# Altium PCB PCB1.PcbDoc (part 6 of 8)
Units mil, origin at the board's own origin, x right, y up, seen from the top; angles counter-clockwise.
Board outline 6000 x 4000 mil, 2 copper layers (Top Layer, Bottom Layer); 1253 components, 565 nets, 6549 pads, 0 vias.
Unrouted connection lines stored in the file: 1925.
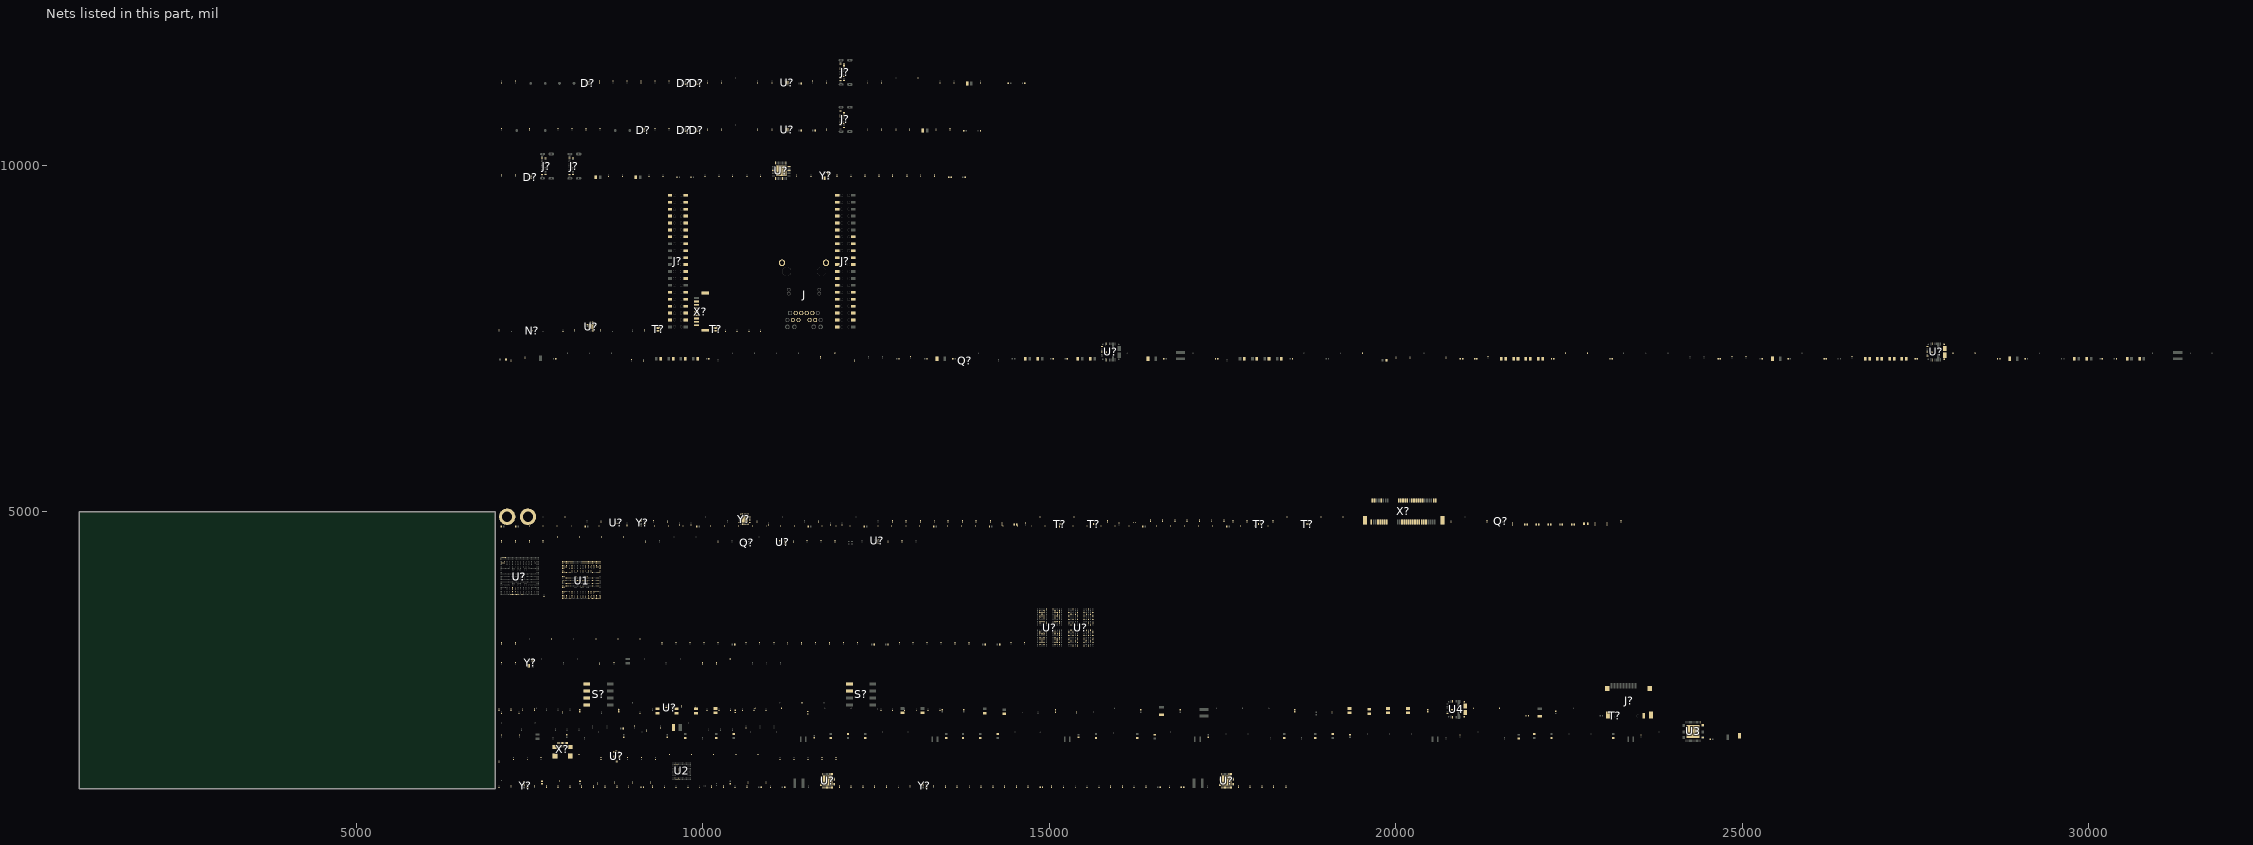
[diagram p4: the nets of this part, all layers, seen from the top]

## Nets (pads, with @x,y where several pads share a name; then routed paths per layer and width w, separated by ;. In a path a pad name is that pad's centre, name@x,y a point inside that pad or via, vN(x,y) a via of type N, cw(c..) or ccw(c..) an arc to the next point about the centre after c; other vN are vias at no path point) (continued)
*PER1_TX2_N: C?.1@10070,10508.58 D?.5@9769.37,10488.58 J?.B3@12037.78,10738.74
*PER1_TX2_P: C?.1@10270,10508.58 D?.4@9749.68,10488.58 J?.B2@12037.78,10758.43
*PER2_TX1_N: C?.1@10790,11188.58 D?.5@9949.37,11168.58 J?.A3@11988.56,11271.1
*PER2_TX1_P: C?.1@10995,11188.58 D?.4@9929.68,11168.58 J?.A2@11988.56,11251.42
*PER2_TX2_N: C?.1@10070,11188.58 D?.5@9769.37,11168.58 J?.B3@12037.78,11418.74
*PER2_TX2_P: C?.1@10270,11188.58 D?.4@9749.68,11168.58 J?.B2@12037.78,11438.43
*USB_mPCIe_N: ?.2@17525,4875.83 T?.3@15171.81,4810.16 X?.36@20327.6,5159.61
*USB_mPCIe_P: ?.2@17345,4875.83 T?.2@15171.81,4829.84 X?.38@20359.09,5159.61
*VBUS_5V_PER1: J?.A4@11988.56,10610.79 J?.A9@11988.56,10709.21 J?.B4@12037.78,10719.06 J?.B9@12037.78,10600.94 R?.2@14007.72,10500 T?.2@13565,10530.83
*VBUS_5V_PER2: J?.A4@11988.56,11290.79 J?.A9@11988.56,11389.21 J?.B4@12037.78,11399.06 J?.B9@12037.78,11280.94 R?.2@14647.72,11180 T?.2@14205,11210.83
\ENET1_INT: U?.31@17630.87,1211.46 U?.AF10@7251.57,3843.46
\ENET1_RST: U?.12@17504.88,1018.54 U?.AC10@7251.57,3902.52
\ENET2_INT: U?.31@11870.87,1211.46 U?.AH17@7389.37,3804.09
\ENET2_RST: U?.12@11744.88,1018.54 U?.AJ16@7369.69,3784.41
\GPIO_EXP_INT: J?.4@11940.63,7765 PTP?.1@8855,4630 U1.E8 U?.A3@7113.78,4335.59
\I_LIMIT_PER1: U?.D2@12500.32,4555.31
\I_LIMIT_PER2: PTP?.1@13105,11260 U?.C4@12539.68,4575
\LoRa_SX1262_RST: X?.10@19792.17,5159.61
\mPCIe_RST: C?.2@18230,4871.42 PTP?.1@18430,4920 T?.2@13340,4870.83 X?.22@20107.13,5159.61
\mPCIe_W_DISABLE: Q?.3@21525,4873.78 R?.1@23250,4848.58 T?.2@13540,4870.83 X?.20@20075.63,5159.61
\PCIE_CLK_REQ: PTP?.1@18920,4920 T?.2@12935,4870.83 U?.1@8736.22,4830.16 X?.7@19744.92,4848.58
\PCIE_CLK_REQ_BUF: PTP?.1@8010,4920 U?.6@8736.22,4850.83 Y?.12@10649.22,4816.18 Y?.19@10649.22,4963.82
\PCIE_WAKE: PTP?.1@19240,4920 T?.2@13140,4870.83 X?.1@19650.43,4848.58
\PER1_INT: R?.1@8315,10508.58 U?.C3@12520,4575
\PER2_INT: R?.1@9110,11188.58 U?.E4@12539.68,4535.63
\USB_HUB_RST: U?.26@11242.2,9979.06
ADJ_mPCIe_PWR: PTP?.1@8220,4630 PTP?.1@11905,7285 Q?.1@13771.22,7188.86 R?.2@11700,7236.42 U?.D4@7133.46,4276.54
BOOT_MODE0: R?.2@7570,2151.42 S?.1@8325.71,2510 U1.G10
BOOT_MODE1: R?.2@7400,2151.42 S?.2@8325.71,2410 U1.F8
BOOT_MODE2: R?.2@7230,2151.42 S?.3@8325.71,2310 U1.G8
BOOT_MODE3: R?.2@7060,2151.42 S?.4@8325.71,2210 U1.G12
CLKIN1: U1.K28
CLKIN2: U1.L28
CLKOUT1: U1.K29
CLKOUT2: U1.L29
CSI1_CKN: U1.E22
CSI1_CKP: U1.D22
CSI1_DN0: U1.E18
CSI1_DN1: U1.E20
CSI1_DN2: U1.E24
CSI1_DN3: U1.E26
CSI1_DP0: U1.D18
CSI1_DP1: U1.D20
CSI1_DP2: U1.D24
CSI1_DP3: U1.D26
CSI2_CKN: U1.B23
CSI2_CKP: U1.A23
CSI2_DN0: U1.B25
CSI2_DN1: U1.B24
CSI2_DN2: U1.B22
CSI2_DN3: U1.B21
CSI2_DP0: U1.A25
CSI2_DP1: U1.A24
CSI2_DP2: U1.A22
CSI2_DP3: U1.A21
DRAM_CA0_A: U1.L6 U?.R2@14863.27,3235.43
DRAM_CA0_B: U1.W4 U?.H2@14863.27,3414.57
DRAM_CA1_A: U1.L4 U?.P2@14863.27,3261.02
DRAM_CA1_B: U1.W5 U?.J2@14863.27,3388.98
DRAM_CA2_A: U1.E4 U?.R9@15083.74,3235.43
DRAM_CA2_B: U1.AE4 U?.H9@15083.74,3414.57
DRAM_CA3_A: U1.D4 U?.R10@15115.24,3235.43
DRAM_CA3_B: U1.AF4 U?.H10@15115.24,3414.57
DRAM_CA4_A: U1.N4 U?.R11@15146.73,3235.43
DRAM_CA4_B: U1.U5 U?.H11@15146.73,3414.57
DRAM_CA5_A: U1.N5 U?.P11@15146.73,3261.02
DRAM_CA5_B: U1.U6 U?.J11@15146.73,3388.98
DRAM_CK_A_N: R?.1@7090,3088.58 U1.M2 U?.P9@15083.74,3261.02
DRAM_CK_A_P: R?.2@7090,3111.42 U1.M1 U?.P8@15052.24,3261.02
DRAM_CK_B_N: R?.1@7295,3088.58 U1.V1 U?.J9@15083.74,3388.98
DRAM_CK_B_P: R?.2@7295,3111.42 U1.V2 U?.J8@15052.24,3388.98
DRAM_CKE0_A: R?.2@11425,3111.42 U1.J6 U?.P4@14926.26,3261.02
DRAM_CKE0_B: R?.2@13840,3111.42 U1.AA4 U?.J4@14926.26,3388.98
DRAM_CKE1_A: R?.2@11225,3111.42 U1.G5 U?.P5@14957.76,3261.02
DRAM_CKE1_B: R?.2@13640,3111.42 U1.AA5 U?.J5@14957.76,3388.98
DRAM_DATA0_A: U1.B3 U?.AA11@15146.73,3081.89
DRAM_DATA0_B: U1.AC1 U?.B2@14863.27,3568.11
DRAM_DATA1_A: U1.A2 U?.Y11@15146.73,3107.48
DRAM_DATA1_B: U1.AB1 U?.C2@14863.27,3542.52
DRAM_DATA2_A: U1.E1 U?.V9@15083.74,3158.66
DRAM_DATA2_B: U1.W2 U?.F2@14863.27,3465.75
DRAM_DATA3_A: U1.F2 U?.U11@15146.73,3184.25
DRAM_DATA3_B: U1.Y2 U?.E2@14863.27,3491.34
DRAM_DATA4_A: U1.E2 U?.U9@15083.74,3184.25
DRAM_DATA4_B: U1.Y1 U?.E4@14926.26,3491.34
DRAM_DATA5_A: U1.C1 U?.V11@15146.73,3158.66
DRAM_DATA5_B: U1.W1 U?.F4@14926.26,3465.75
DRAM_DATA6_A: U1.C2 U?.Y9@15083.74,3107.48
DRAM_DATA6_B: U1.AC2 U?.C4@14926.26,3542.52
DRAM_DATA7_A: U1.B1 U?.AA9@15083.74,3081.89
DRAM_DATA7_B: U1.AD1 U?.B4@14926.26,3568.11
DRAM_DATA8_A: U1.G1 U?.AA2@14863.27,3081.89
DRAM_DATA8_B: U1.AH3 U?.B11@15146.73,3568.11
DRAM_DATA9_A: U1.H1 U?.Y2@14863.27,3107.48
DRAM_DATA9_B: U1.AJ2 U?.C11@15146.73,3542.52
DRAM_DATA10_A: U1.K1 U?.V4@14926.26,3158.66
DRAM_DATA10_B: U1.AE1 U?.E11@15146.73,3491.34
DRAM_DATA11_A: U1.K2 U?.V2@14863.27,3158.66
DRAM_DATA11_B: U1.AD2 U?.F11@15146.73,3465.75
DRAM_DATA12_A: U1.L2 U?.U2@14863.27,3184.25
DRAM_DATA12_B: U1.AE2 U?.F9@15083.74,3465.75
DRAM_DATA13_A: U1.L1 U?.U4@14926.26,3184.25
DRAM_DATA13_B: U1.AG1 U?.E9@15083.74,3491.34
DRAM_DATA14_A: U1.G2 U?.Y4@14926.26,3107.48
DRAM_DATA14_B: U1.AG2 U?.C9@15083.74,3542.52
DRAM_DATA15_A: U1.F1 U?.AA4@14926.26,3081.89
DRAM_DATA15_B: U1.AH1 U?.B9@15083.74,3568.11
DRAM_DMI0_A: U1.B2 U?.Y10@15115.24,3107.48
DRAM_DMI0_B: U1.AB2 U?.C3@14894.76,3542.52
DRAM_DMI1_A: U1.H2 U?.Y3@14894.76,3107.48
DRAM_DMI1_B: U1.AH2 U?.C10@15115.24,3542.52
DRAM_nCS0_A: U1.N6 U?.R4@14926.26,3235.43
DRAM_nCS0_B: U1.U4 U?.H4@14926.26,3414.57
DRAM_nCS1_A: U1.J4 U?.R3@14894.76,3235.43
DRAM_nCS1_B: U1.AA6 U?.H3@14894.76,3414.57
DRAM_nRESET: PTP?.1@9095,3160 R?.2@9410,3111.42 U1.T1 U?.T11@15146.73,3209.84
DRAM_SDQS0_A_N: U1.D1 U?.V10@15115.24,3158.66
DRAM_SDQS0_A_P: U1.D2 U?.W10@15115.24,3133.07
DRAM_SDQS0_B_N: U1.AA1 U?.E3@14894.76,3491.34
DRAM_SDQS0_B_P: U1.AA2 U?.D3@14894.76,3516.93
DRAM_SDQS1_A_N: U1.J1 U?.V3@14894.76,3158.66
DRAM_SDQS1_A_P: U1.J2 U?.W3@14894.76,3133.07
DRAM_SDQS1_B_N: U1.AF1 U?.E10@15115.24,3491.34
DRAM_SDQS1_B_P: U1.AF2 U?.D10@15115.24,3516.93
DRAM_VREF: PTP?.1@8775,3160 U1.R2
DRAM_ZQ0: PTP?.1@8455,3160 U?.A5@14957.76,3593.7
DRAM_ZQ1: PTP?.1@7815,3160 U?.A8@15052.24,3593.7
DSI_CKN: U1.B18
DSI_CKP: U1.A18
DSI_DN0: U1.B16
DSI_DN1: U1.B17
DSI_DN2: U1.B19
DSI_DN3: U1.B20
DSI_DP0: U1.A16
DSI_DP1: U1.A17
DSI_DP2: U1.A19
DSI_DP3: U1.A20
EARC_AUX: U1.AH23
EARC_N_HPD: C?.1@7465,1423.58 U1.AH22
EARC_P_UTIL: C?.1@7265,1423.58 U1.AJ23
ECSPI1_MISO: U1.AD20
ECSPI1_MOSI: U1.AC20
ECSPI1_SCLK: U1.AF20
ECSPI1_SS0: U1.AE20
ECSPI2_MISO: J?.36@9525.63,9365 U1.AH20
ECSPI2_MOSI: J?.34@9525.63,9265 U1.AJ21
ECSPI2_SCLK: J?.38@9525.63,9465 U1.AH21
ECSPI2_SS0: U1.AJ22
eMMC_VDDIM: C65.2 C66.1 PTP1.1 U2.C2
EN_mPCIe_PWR: PTP?.1@8535,4630 R?.2@7695,4581.42 U?.2@15760.08,7383.74 U?.10@15760.08,7226.26
EN_SMPS_RBC: PTP?.1@7900,4630 R?.2@7495,4581.42 U?.2@27675.08,7383.74
ENET1_MDC: U?.13@17520.63,1018.54 U?.AH9@7231.89,3804.09
ENET1_MDIO: U?.14@17536.38,1018.54 U?.AJ8@7212.2,3784.41
ENET1_RD0: U?.25@17656.46,1107.13 U?.AD10@7251.57,3882.83
ENET1_RD1: U?.24@17656.46,1091.38 U?.AE10@7251.57,3863.15
ENET1_RD2: U?.23@17656.46,1075.63 U?.AH10@7251.57,3804.09
ENET1_RD3: U?.22@17656.46,1059.88 U?.AH12@7290.94,3804.09
ENET1_RX_CTL: U?.26@17656.46,1122.87 U?.AF12@7290.94,3843.46
ENET1_RXC: U?.27@17656.46,1138.62 U?.AJ12@7290.94,3784.41
ENET1_TD0: U?.18@17599.37,1018.54 U?.AJ11@7271.26,3784.41
ENET1_TD1: U?.17@17583.62,1018.54 U?.AJ10@7251.57,3784.41
ENET1_TD2: U?.16@17567.87,1018.54 U?.AH11@7271.26,3804.09
ENET1_TD3: U?.15@17552.13,1018.54 U?.AD12@7290.94,3882.83
ENET1_TX_CTL: U?.19@17615.12,1018.54 U?.AH13@7310.63,3804.09
ENET1_TXC: U?.20@17630.87,1018.54 U?.AH14@7330.31,3804.09
ENET2_MDC: U1.AH28 U?.13@11760.63,1018.54
ENET2_MDIO: U1.AH29 U?.14@11776.38,1018.54
ENET2_RD0: U1.AG29 U?.25@11896.46,1107.13
ENET2_RD1: U1.AG28 U?.24@11896.46,1091.38
ENET2_RD2: U1.AF29 U?.23@11896.46,1075.63
ENET2_RD3: U1.AF28 U?.22@11896.46,1059.88
ENET2_RX_CTL: U1.AE28 U?.26@11896.46,1122.87
ENET2_RXC: U1.AE29 U?.27@11896.46,1138.62
ENET2_TD0: U1.AC25 U?.18@11839.37,1018.54
ENET2_TD1: U1.AE26 U?.17@11823.62,1018.54
ENET2_TD2: U1.AF26 U?.16@11807.87,1018.54
ENET2_TD3: U1.AD24 U?.15@11792.13,1018.54
ENET2_TX_CTL: U1.AF24 U?.19@11855.12,1018.54
ENET2_TXC: U1.AE24 U?.20@11870.87,1018.54
GND: 1?.1@16219.17,4840 ?.1@16460,4854.17 ?.1@16635,4854.17 ?.1@16815,4854.17 ?.1@16990,4854.17 ?.1@17170,4854.17 ?.1@17345,4854.17 ?.1@17525,4854.17 C1.1 C2.1 C3.1 C4.1 C5.1 C6.1 C7.1 C8.1 C9.1 C10.1 C11.1 C12.1 C13.1 C14.1 C15.1 C16.1 C17.1 C18.1 C19.1 C20.1 C21.1 C22.1 C23.1 C24.1 C25.1 C26.1 C27.1 C28.1 C29.1 C30.1 C31.1 C32.1 C33.1 C34.1 C35.1 C36.1 C37.1 C38.1 C39.1 C40.1 C41.1 C42.1 C43.1 C44.1 C45.1 C46.1 C47.1 C48.1 C49.1 C50.1 C51.1 C52.1 C53.1 C54.1 C55.1 C56.1 C57.1 C58.1 C59.1 C60.2 C61.1 C62.1 C63.1 C64.1 C65.1 C66.2 C67.1 C68.2 C69.1 C70.2 C71.1 C72.2 C73.1 C74.2 C75.2 C76.1 C77.1 C78.1 C79.1 C80.1 C81.2 C82.1 C83.1 C84.1 C85.2 C86.1 C87.1 C88.1 C89.1 C90.2 C91.1 C92.2 C93.1 C94.1 C95.2 C96.2 C97.2 C98.1 C99.2 C100.2 C101.2 C102.2 C103.2 C104.2 C105.1 C106.1 C107.1 C108.2 C109.2 C110.1 C111.1 C112.2 C113.1 C114.2 C115.2 C116.2 C117.2 C118.2 C119.2 C120.2 C121.2 C122.1 C123.2 C?.1@7060,1383.58 C?.1@7980,7598.58 C?.1@8453.5,9825 C?.1@8510,2798.58 C?.1@8530,1423.58 C?.1@8530,4848.58 C?.1@8640,9833.58 C?.1@8905,4808.58 C?.1@8930,1013.58 C?.1@9033.5,9825 C?.1@9107.28,1020 C?.1@9140,7173.58 C?.1@9175,4558.58 C?.1@9220,9833.58 C?.1@9385,1878.58 C?.1@9445,1013.58 C?.1@9490,4848.58 C?.1@9574.8,1885 C?.1@9615,1013.58 C?.1@9660,4808.58 C?.1@9785,1013.58 C?.1@9830,4808.58 C?.1@9890,2168.58 C?.1@9955,1013.58 C?.1@10295,1013.58 C?.1@10325,7598.58 C?.1@10465,1013.58 C?.1@10495,7598.58 C?.1@10625,1878.58 C?.1@10665,7598.58 C?.1@10780,4848.58 C?.1@10835,7598.58 C?.1@10950,4808.58 C?.1@10975,1013.58 C?.1@11305,4558.58 C?.1@11355,9833.58 C?.1@11560,9833.58 C?.1@11670,4848.58 C?.1@11830,3088.58 C?.1@11840,4808.58 C?.1@11905,4558.58 C?.1@11970,1013.58 C?.1@12010,4808.58 C?.1@12135,9833.58 C?.1@12140,1013.58 C?.1@12670,4558.58 C?.1@12785,10508.58 C?.1@12875,4558.58 C?.1@12985,10508.58 C?.1@13173.5,10500 C?.1@13365,10508.58 C?.1@13379.88,7205 C?.1@13425,11188.58 C?.1@13547.28,9825 C?.1@13609.25,7205 C?.1@13625,11188.58 C?.1@13813.5,11180 C?.1@14005,11188.58 C?.1@14320,4808.58 C?.1@14653.5,7205 C?.1@14695,1013.58 C?.1@14833.5,7205 C?.1@14867.28,1020 C?.1@15205,1013.58 C?.1@15375,1013.58 C?.1@15413.5,7205 C?.1@15545,1013.58 C?.1@15593.5,7205 C?.1@15715,1013.58 C?.1@16055,1013.58 C?.1@16225,1013.58 C?.1@16424.88,7205 C?.1@16654.25,7205 C?.1@16735,1013.58 C?.1@16907.28,1020 C?.1@17399.25,7205 C?.1@17730,1013.58 C?.1@17900,1013.58 C?.1@18230,4848.58 C?.1@21139.25,7205 C?.1@21862.28,4815 C?.1@22032.28,4815 C?.1@22202.28,4815 C?.1@22372.28,4815 C?.1@22542.28,4815 C?.1@22717.44,4825 C?.1@22880,4808.58 C?.1@25439.88,7205 C?.1@25664.25,7205 C?.1@26184.25,7205 C?.1@28864.88,7205 C?.1@29089.25,7205 C?.1@29798.5,7205 C?.1@29978.5,7205 C?.1@30558.5,7205 C?.1@30738.5,7205 C?.2@7060,7621.42 C?.2@7090,2821.42 C?.2@7090,10531.42 C?.2@7230,1036.42 C?.2@7295,2821.42 C?.2@7295,11211.42 C?.2@7500,10531.42 C?.2@7570,1036.42 C?.2@7875.75,7205 C?.2@8505,11211.42 C?.2@8525,7621.42 C?.2@8715,2821.42 C?.2@8852.72,1870 C?.2@8915,1446.42 C?.2@8970,7196.42 C?.2@9015,1901.42 C?.2@9115,1446.42 C?.2@9290,4871.42 C?.2@9391.5,7205 C?.2@9571.5,7205 C?.2@9615,3111.42 C?.2@9690,2191.42 C?.2@9746.5,7205 C?.2@9815,3111.42 C?.2@9926.5,7205 C?.2@10015,3111.42 C?.2@10085.75,7205 C?.2@10220,3111.42 C?.2@10457.72,3080 C?.2@10620,3111.42 C?.2@10820,3111.42 C?.2@10842.72,1020 C?.2@11025,3111.42 C?.2@11422.72,10500 C?.2@11422.72,11180 C?.2@11585,11211.42 C?.2@11622.72,10500 C?.2@11625,3111.42 C?.2@11830,3111.42 C?.2@12030,3111.42 C?.2@12230,3111.42 C?.2@12340,9856.42 C?.2@12472.72,3080 C?.2@12540,9856.42 C?.2@12672.72,3080 C?.2@12740,9856.42 C?.2@12830.75,7205 C?.2@12835,3111.42 C?.2@12945,9856.42 C?.2@12990,1036.42 C?.2@12995,7236.42 C?.2@13035,3111.42 C?.2@13145,9856.42 C?.2@13235,3111.42 C?.2@13235.75,7205 C?.2@13330,1036.42 C?.2@13345,9856.42 C?.2@13440,3111.42 C?.2@14077.72,3080 C?.2@14282.72,3080 C?.2@14445,3111.42 C?.2@14527.72,4815 C?.2@14645,3111.42 C?.2@15055.75,7205 C?.2@15260.75,7205 C?.2@16602.72,1020 C?.2@17816.5,7205 C?.2@17996.5,7205 C?.2@18171.5,7205 C?.2@18351.5,7205 C?.2@18510.75,7205 C?.2@20965.75,7205 C?.2@21586.5,7205 C?.2@21685,4831.42 C?.2@21766.5,7205 C?.2@21941.5,7205 C?.2@22121.5,7205 C?.2@22280.75,7205 C?.2@23050,4831.42 C?.2@24685.75,7205 C?.2@25055,7236.42 C?.2@25290.75,7205 C?.2@26841.5,7205 C?.2@27016.5,7205 C?.2@27196.5,7205 C?.2@27371.5,7205 C?.2@27530.75,7205 C?.2@30200.75,7205 C?.2@30405.75,7205 D?.3@7515,9808.58 D?.3@8345,11168.58 D?.3@9150,10488.58 D?.3@9730,10488.58 D?.3@9730,11168.58 D?.3@9910,10488.58 D?.3@9910,11168.58 D?.8@7515,9841.44 D?.8@8345,11201.44 D?.8@9150,10521.44 D?.8@9730,10521.44 D?.8@9730,11201.44 D?.8@9910,10521.44 D?.8@9910,11201.44 J2.1 J.S1@11142.5,8590 J.S2@11777.5,8590 J?.1@23580,2050 J?.3@9754.37,7765 J?.3@12169.37,7765 J?.5@9754.37,7865 J?.5@12169.37,7865 J?.7@9754.37,7965 J?.7@12169.37,7965 J?.9@9754.37,8065 J?.9@12169.37,8065 J?.10@23056.1,2443.7 J?.11@23666.34,2443.7 J?.12@23065.94,2065.75 J?.13@23684.06,2065.75 J?.15@9754.37,8365 J?.17@9754.37,8465 J?.19@9754.37,8565 J?.19@12169.37,8565 J?.21@9754.37,8665 J?.21@12169.37,8665 J?.23@9754.37,8765 J?.23@12169.37,8765 J?.25@12169.37,8865 J?.27@12169.37,8965 J?.28@9525.63,8965 J?.28@11940.63,8965 J?.30@9525.63,9065 J?.30@11940.63,9065 J?.32@11940.63,9165 J?.34@11940.63,9265 J?.36@11940.63,9365 J?.38@11940.63,9465 J?.40@9525.63,9565 J?.40@11940.63,9565 J?.A1@7678.56,9864.92 J?.A1@8073.56,9864.92 J?.A1@11988.56,10539.92 J?.A1@11988.56,11219.92 J?.A12@7678.56,10105.08 J?.A12@8073.56,10105.08 J?.A12@11988.56,10780.08 J?.A12@11988.56,11460.08 J?.B1@7727.78,10103.11 J?.B1@8122.78,10103.11 J?.B1@12037.78,10778.11 J?.B1@12037.78,11458.11 J?.B12@7727.78,9866.89 J?.B12@8122.78,9866.89 J?.B12@12037.78,10541.89 J?.B12@12037.78,11221.89 L?.2@7090,9856.42 L?.2@7295,9856.42 L?.2@9510,10531.42 L?.2@9510,11211.42 M?.1@7175,4925 M?.1@7475,4925 N?.1@7524.65,7619.45 N?.3@7540,7610 PTP?.1@11430,2240 Q?.1@10615.39,4569.69 Q?.2@13771.22,7171.14 Q?.2@21533.86,4846.22 R13.2 R16.2 R17.1 R18.1 R?.1@7060,1013.58 R?.1@7060,2128.58 R?.1@7090,4558.58 R?.1@7090,11188.58 R?.1@7230,2128.58 R?.1@7230,7173.58 R?.1@7295,4558.58 R?.1@7400,2128.58 R?.1@7435,7213.58 R?.1@7495,4558.58 R?.1@7570,2128.58 R?.1@7695,4558.58 R?.1@7710,3773.58 R?.1@9410,3088.58 R?.1@10030,9833.58 R?.1@10220,4558.58 R?.1@10230,9833.58 R?.1@10430,9833.58 R?.1@10635,1013.58 R?.1@10635,9833.58 R?.1@10835,9833.58 R?.1@11225,3088.58 R?.1@11425,3088.58 R?.1@11700,7213.58 R?.1@12190,7173.58 R?.1@12380,10508.58 R?.1@12380,11188.58 R?.1@12580,10508.58 R?.1@12580,11188.58 R?.1@12820,1013.58 R?.1@13640,3088.58 R?.1@13840,3088.58 R?.1@16395,1013.58 R?.1@20005,7213.58 R?.1@20210,7213.58 R?.1@20730,7213.58 R?.1@20800,4848.58 R?.2@7665,1446.42 R?.2@9155,7621.42 R?.2@9310,10531.42 R?.2@9310,11211.42 R?.2@9995,2821.42 R?.2@10195,2821.42 R?.2@24855,7236.42 S?.1@12115.71,2510 S?.2@12115.71,2410 T?.1@8840,9834.17 T?.1@9185,1834.17 T?.1@9425,9834.17 T?.1@12735,4849.17 T?.1@12935,4849.17 T?.1@13140,4849.17 T?.1@13340,4849.17 T?.1@13540,4849.17 T?.1@13565,10509.17 T?.1@13745,4849.17 T?.1@13945,4849.17 T?.1@14150,4849.17 T?.1@14205,11189.17 T?.1@17855,4849.17 T?.1@21320,4849.17 T?.2@7158.31,7195 T?.3@9360,7609.33 T?.3@10190,7609.33 T?.8@9360,7650.67 T?.8@10190,7650.67 T?.B1 U1.A1 U1.A29 U1.AA3 U1.AA7 U1.AA23 U1.AA27 U1.AB8 U1.AB10 U1.AB12 U1.AB14 U1.AB16 U1.AB18 U1.AB20 U1.AB22 U1.AC3 U1.AC6 U1.AC24 U1.AC27 U1.AE3 U1.AE27 U1.AG4 U1.AG6 U1.AG8 U1.AG10 U1.AG12 U1.AG14 U1.AG16 U1.AG18 U1.AG20 U1.AG22 U1.AG24 U1.AG26 U1.AJ1 U1.AJ29 U1.C4 U1.C6 U1.C8 U1.C10 U1.C12 U1.C14 U1.C16 U1.C18 U1.C20 U1.C22 U1.C24 U1.C26 U1.E3 U1.E27 U1.G3 U1.G6 U1.G24 U1.G27 U1.H8 U1.H10 U1.H12 U1.H14 U1.H16 U1.H18 U1.H20 U1.H22 U1.J3 U1.J7 U1.J23 U1.J27 U1.L3 U1.L7 U1.L14 U1.L16 U1.L23 U1.L27 U1.M11 U1.M19 U1.N3 U1.N7 U1.N11 U1.N19 U1.N23 U1.N27 U1.P11 U1.P19 U1.R3 U1.R7 U1.R11 U1.R12 U1.R13 U1.R14 U1.R16 U1.R17 U1.R18 U1.R19 U1.R23 U1.R27 U1.T11 U1.T19 U1.U3 U1.U7 U1.U11 U1.U18 U1.U19 U1.U23 U1.U27 U1.V11 U1.V19 U1.W3 U1.W7 U1.W14 U1.W16 U1.W23 U1.W27 U2.A6 U2.C4 U2.E7 U2.G5 U2.H10 U2.J5 U2.K8 U2.N2 U2.N5 U2.P4 U2.P6 U3.5 U3.30 U3.43 U3.57 U4.6 U4.13 U4.26 U4.28 U?.1@8330.94,7701.5 U?.2@8750,4829.17 U?.2@9487.2,2170 U?.3@8763.78,4829.17 U?.5@8722.52,1472.87 U?.5@11187.4,4525.47 U?.6@15758.11,7305 U?.6@27673.11,7305 U?.13@8787.48,1394.13 U?.13@15830.94,7188.86 U?.13@27745.94,7188.86 U?.17@8405.75,7729.06 U?.18@8787.48,1472.87 U?.19@8374.25,7729.06 U?.19@11215,10510 U?.19@11215,11190 U?.21@8390,7670 U?.26@15830.94,7421.14 U?.26@27745.94,7421.14 U?.28@15824.06,7299.09 U?.28@27739.06,7299.09 U?.37@11130,9920 U?.41@11800,1115 U?.41@17560,1115 U?.A3@15344.76,3593.7 U?.A10@15565.24,3593.7 U?.AB3@15344.76,3056.3 U?.AB5@15407.76,3056.3 U?.AB8@15502.24,3056.3 U?.AB10@15565.24,3056.3 U?.C1@15281.77,3542.52 U?.C5@15407.76,3542.52 U?.C8@15502.24,3542.52 U?.C12@15628.23,3542.52 U?.D2@15313.27,3516.93 U?.D4@15376.26,3516.93 U?.D9@15533.74,3516.93 U?.D11@15596.73,3516.93 U?.E1@15281.77,3491.34 U?.E2@7094.09,4256.85 U?.E2@12500.32,4535.63 U?.E5@15407.76,3491.34 U?.E8@15502.24,3491.34 U?.E12@15628.23,3491.34 U?.G1@15281.77,3440.16 U?.G3@15344.76,3440.16 U?.G5@15407.76,3440.16 U?.G8@15502.24,3440.16 U?.G10@15565.24,3440.16 U?.G12@15628.23,3440.16 U?.J1@15281.77,3388.98 U?.J3@15344.76,3388.98 U?.J10@15565.24,3388.98 U?.J12@15628.23,3388.98 U?.K2@15313.27,3363.39 U?.K4@15376.26,3363.39 U?.K9@15533.74,3363.39 U?.K11@15596.73,3363.39 U?.N2@15313.27,3286.61 U?.N4@15376.26,3286.61 U?.N9@15533.74,3286.61 U?.N11@15596.73,3286.61 U?.P1@15281.77,3261.02 U?.P3@15344.76,3261.02 U?.P10@15565.24,3261.02 U?.P12@15628.23,3261.02 U?.T1@15281.77,3209.84 U?.T3@15344.76,3209.84 U?.T5@15407.76,3209.84 U?.T8@15502.24,3209.84 U?.T10@15565.24,3209.84 U?.T12@15628.23,3209.84 U?.V1@15281.77,3158.66 U?.V5@15407.76,3158.66 U?.V8@15502.24,3158.66 U?.V12@15628.23,3158.66 U?.W2@15313.27,3133.07 U?.W4@15376.26,3133.07 U?.W9@15533.74,3133.07 U?.W11@15596.73,3133.07 U?.Y1@15281.77,3107.48 U?.Y5@15407.76,3107.48 U?.Y8@15502.24,3107.48 U?.Y12@15628.23,3107.48 X?.4@19697.68,5159.61 X?.9@19776.42,4848.58 X?.15@19870.91,4848.58 X?.16@7927.76,1610.77 X?.18@20044.13,5159.61 X?.20@8085.24,1602.89 X?.21@7864.76,1602.89 X?.21@20091.38,4848.58 X?.22@7864.76,1471 X?.23@8085.24,1471 X?.26@20170.12,5159.61 X?.27@20185.87,4848.58 X?.29@20217.36,4848.58 X?.34@20296.1,5159.61 X?.35@20311.85,4848.58 X?.37@20343.35,4848.58 X?.40@20390.59,5159.61 X?.43@20437.83,4848.58 X?.50@20548.07,5159.61 X?.MP1@10035.12,8154.69 X?.MP1@19554.96,4872.2 X?.MP2@10035.12,7615.31 X?.MP2@20675.04,4872.2 Y?.2@7467.56,1018.35 Y?.2@7485.47,2775.63 Y?.2@9157.56,4818.35 Y?.2@11750.47,9810.63 Y?.2@13227.56,1018.35 Y?.4@7412.44,1061.65 Y?.4@7544.53,2854.37 Y?.4@9102.44,4861.65 Y?.4@11809.53,9889.37 Y?.4@13172.44,1061.65 Y?.5@10526.18,4860.48 Y?.6@10526.18,4840.79 Y?.10@10609.85,4816.18 Y?.15@10673.82,4880.16 Y?.21@10609.85,4963.82 Y?.23@10570.48,4963.82 Y?.24@10550.79,4963.82 Y?.25@10600,4890
GPIO1_IO00: J?.2@11940.63,7665 U1.A7 U?.A3@12520,4614.37
GPIO1_IO05: J?.6@11940.63,7865 U1.B4
GPIO1_IO06: J?.8@11940.63,7965 U1.A3
GPIO1_IO07: J?.10@11940.63,8065 U1.F6
GPIO1_IO08: J?.12@11940.63,8165 U1.A8
GPIO1_IO09: J?.14@11940.63,8265 U1.B8
GPIO1_IO10: J?.16@11940.63,8365 U1.B7
GPIO1_IO11: J?.18@11940.63,8465 U1.D8
GPIO1_IO12: J?.20@11940.63,8565 U1.A5
GPIO1_IO13: J?.22@11940.63,8665 U1.A6
GPIO1_IO14: J?.24@11940.63,8765 U1.A4
GPIO1_IO15: J?.26@11940.63,8865 U1.B5
HDMI_5V0: C?.2@8530,1446.42 PTP?.1@8210,1495 R?.2@11720,1446.42 R?.2@11920,1446.42 U?.12@8762.87,1393.15 X?.19@7904.13,1659
HDMI_CEC: PTP?.1@10475,1495 R?.1@11520,1423.58 U1.AD22 U?.24@8747.13,1536.85
HDMI_CEC_B: U?.6@8722.52,1457.13 X?.15@7935.63,1659
HDMI_DDC_SCL: PTP?.1@10155,1495 R?.1@11315,1423.58 U1.AC22 U?.1@8722.52,1535.87
HDMI_DDC_SDA: PTP?.1@9520,1495 R?.1@11115,1423.58 U1.AF22 U?.2@8722.52,1520.12
HDMI_HPD: U1.AE22 U?.3@8722.52,1504.37
HDMI_SCL_B: PTP?.1@10795,1495 R?.1@11920,1423.58 U?.7@8722.52,1441.38 X?.17@7919.88,1659
HDMI_SDA_B: PTP?.1@9835,1495 R?.1@11720,1423.58 U?.8@8722.52,1425.63 X?.18@7912.01,1610.77
HDMI_TX0_N: U1.AJ25 U?.16@8787.48,1441.38 X?.11@7967.13,1659
HDMI_TX0_P: U1.AH25 U?.17@8787.48,1457.13 X?.9@7982.87,1659
HDMI_TX1_N: U1.AJ26 U?.19@8787.48,1488.62 X?.8@7990.75,1610.77
HDMI_TX1_P: U1.AH26 U?.20@8787.48,1504.37 X?.6@8006.5,1610.77
HDMI_TX2_N: U1.AJ27 U?.21@8787.48,1520.12 X?.5@8014.37,1659
HDMI_TX2_P: U1.AH27 U?.22@8787.48,1535.87 X?.3@8030.12,1659
HDMI_TXC_N: U1.AJ24 U?.14@8787.48,1409.88 X?.14@7943.5,1610.77
HDMI_TXC_P: U1.AH24 U?.15@8787.48,1425.63 X?.12@7959.25,1610.77
HDMI_UTILITY: T?.A2 X?.2@8037.99,1610.77
HPD_B: T?.A1 U?.9@8722.52,1409.88 X?.1@8045.87,1659
I2C1_SCL: J?.25@9754.37,8865 R?.1@13420,2128.58 U1.AC8 U3.41
I2C1_SDA: J?.27@9754.37,8965 R?.1@13250,2128.58 U1.AH7 U3.42
I2C2_SCL: J?.29@9754.37,9065 R?.1@13080,2128.58 U1.AH6 U?.10@8421.5,7610.94
I2C2_SDA: J?.31@9754.37,9165 R?.1@12910,2128.58 U1.AE8 U?.9@8405.75,7610.94
I2C3_SCL: J?.33@9754.37,9265 R?.1@12740,2128.58 U1.AJ7
I2C3_SDA: J?.35@9754.37,9365 R?.1@12570,2128.58 U1.AJ6
I2C4_SCL: J?.37@9754.37,9465 R?.1@10910,2128.58 U1.AF8
I2C4_SDA: J?.39@9754.37,9565 R?.1@10740,2128.58 U1.AD8
I2C5_SCL: N?.2@7524.65,7600.55 R?.1@10570,2128.58 U?.A5@7153.15,4335.59
I2C5_SDA: N?.4@7555.35,7600.55 R?.1@10400,2128.58 U?.A4@7133.46,4335.59
I2C6_SCL: R?.1@10230,2128.58 R?.2@17655,4871.42 T?.2@13945,4870.83 U?.7@11187.4,4564.84 U?.A5@12559.37,4614.37 Y?.8@10570.48,4816.18
I2C6_SCL_mPCIe: PTP?.1@15355,4920 R?.1@17655,4848.58 X?.30@20233.11,5159.61
I2C6_SDA: R?.1@10060,2128.58 R?.2@15840,4871.42 T?.2@13745,4870.83 U?.6@11187.4,4545.16 U?.A4@12539.68,4614.37 Y?.9@10590.16,4816.18
I2C6_SDA_mPCIe: PTP?.1@14865,4920 R?.1@15840,4848.58 X?.32@20264.61,5159.61
iMX8_ECSPI2.ECSPI2_SS0: J?.32@9525.63,9165
IO_P0_1: J?.4@9525.63,7765 R?.2@7090,4581.42
IO_P0_2: J?.6@9525.63,7865 U?.B1@7074.41,4315.91
IO_P1_0: J?.8@9525.63,7965 R?.2@7295,4581.42 U?.E3@7113.78,4256.85
IO_P1_1: J?.10@9525.63,8065 U?.E4@7133.46,4256.85
IO_P1_2: J?.12@9525.63,8165
JTAG_MOD: PTP?.1@10395,2870 R?.1@9995,2798.58 U1.G20
JTAG_TCK: R?.1@10195,2798.58 U1.G18
JTAG_TDI: U1.G16
JTAG_TDO: U1.F14
JTAG_TMS: U1.G14
LAN1_LED0: R?.2@16395,1036.42 U?.32@17615.12,1211.46
LAN1_LED1: R?.1@18415,1013.58 U?.33@17599.37,1211.46
LAN1_LED2: R?.1@18240,1013.58 U?.34@17583.62,1211.46
LAN1_TXRXA_N: C?.1@14525,1013.58 U?.2@17463.54,1170.12
LAN1_TXRXA_P: C?.1@15035,1013.58 U?.1@17463.54,1185.87
LAN1_TXRXB_N: C?.1@14185,1013.58 U?.5@17463.54,1122.87
LAN1_TXRXB_P: C?.1@14355,1013.58 U?.4@17463.54,1138.62
LAN1_TXRXC_N: C?.1@13845,1013.58 U?.7@17463.54,1091.38
LAN1_TXRXC_P: C?.1@14015,1013.58 U?.6@17463.54,1107.13
LAN1_TXRXD_N: C?.1@13500,1013.58 U?.10@17463.54,1044.13
LAN1_TXRXD_P: C?.1@13670,1013.58 U?.9@17463.54,1059.88
LAN2_LED0: R?.2@10635,1036.42 U?.32@11855.12,1211.46
LAN2_LED1: R?.1@12650,1013.58 U?.33@11839.37,1211.46
LAN2_LED2: R?.1@12480,1013.58 U?.34@11823.62,1211.46
LAN2_TXRXA_N: C?.1@8760,1013.58 U?.2@11703.54,1170.12
LAN2_TXRXA_P: C?.1@9275,1013.58 U?.1@11703.54,1185.87
LAN2_TXRXB_N: C?.1@8420,1013.58 U?.5@11703.54,1122.87
LAN2_TXRXB_P: C?.1@8590,1013.58 U?.4@11703.54,1138.62
LAN2_TXRXC_N: C?.1@8080,1013.58 U?.7@11703.54,1091.38
LAN2_TXRXC_P: C?.1@8250,1013.58 U?.6@11703.54,1107.13
LAN2_TXRXD_N: C?.1@7740,1013.58 U?.10@11703.54,1044.13
LAN2_TXRXD_P: C?.1@7910,1013.58 U?.9@11703.54,1059.88
LVDS0_CLK_N: U1.G28
LVDS0_CLK_P: U1.F29
LVDS0_TX0_N: U1.E28
LVDS0_TX0_P: U1.D29
LVDS0_TX1_N: U1.F28
LVDS0_TX1_P: U1.E29
LVDS0_TX2_N: U1.H28
LVDS0_TX2_P: U1.G29
LVDS0_TX3_N: U1.J28
LVDS0_TX3_P: U1.H29
LVDS1_CLK_N: U1.B28
LVDS1_CLK_P: U1.A28
LVDS1_TX0_N: U1.B26
LVDS1_TX0_P: U1.A26
LVDS1_TX1_N: U1.B27
LVDS1_TX1_P: U1.A27
LVDS1_TX2_N: U1.C28
LVDS1_TX2_P: U1.B29
LVDS1_TX3_N: U1.D28
LVDS1_TX3_P: U1.C29
mPCIe_CLK_N: Y?.18@10673.82,4939.22
mPCIe_CLK_P: Y?.17@10673.82,4919.53
mPCIe_CON_CLK_N: T?.1@18718.19,4829.84 Y?.14@10673.82,4860.48
mPCIe_CON_CLK_P: T?.4@18718.19,4810.16 Y?.13@10673.82,4840.79
mPCIe_RX_N: T?.1@18023.19,4829.84
mPCIe_RX_P: T?.4@18023.19,4810.16
mPCIe_SMPS_3V3: C?.1@14492.28,4815 C?.1@21685,4808.58 C?.1@23050,4808.58 C?.2@14320,4831.42 C?.2@17430.75,7205 C?.2@21897.72,4815 C?.2@22067.72,4815 C?.2@22237.72,4815 C?.2@22407.72,4815 C?.2@22577.72,4815 C?.2@22772.56,4825 C?.2@22880,4831.42 L?.2@19867.56,7185 PTP?.1@19520,7285 R?.2@23250,4871.42 T?.2@12735,4870.83 T?.2@14150,4870.83 T?.2@17855,4870.83 T?.2@21320,4870.83 X?.2@19666.18,5159.61 X?.24@20138.62,5159.61 X?.39@20374.84,4848.58 X?.41@20406.34,4848.58 X?.52@20579.57,5159.61
mPCIe_TX_N: T?.1@15638.19,4829.84
mPCIe_TX_P: T?.4@15638.19,4810.16